# Altium PCB Single Channel Isolated Gate Driver Test Board.PcbDoc
Units mm, origin at the board's own origin, x right, y up, seen from the top; angles counter-clockwise.
Board outline 61.47 x 44.45 mm, 2 copper layers (Top Layer, Bottom Layer); 42 components, 19 nets, 91 pads, 4 vias.
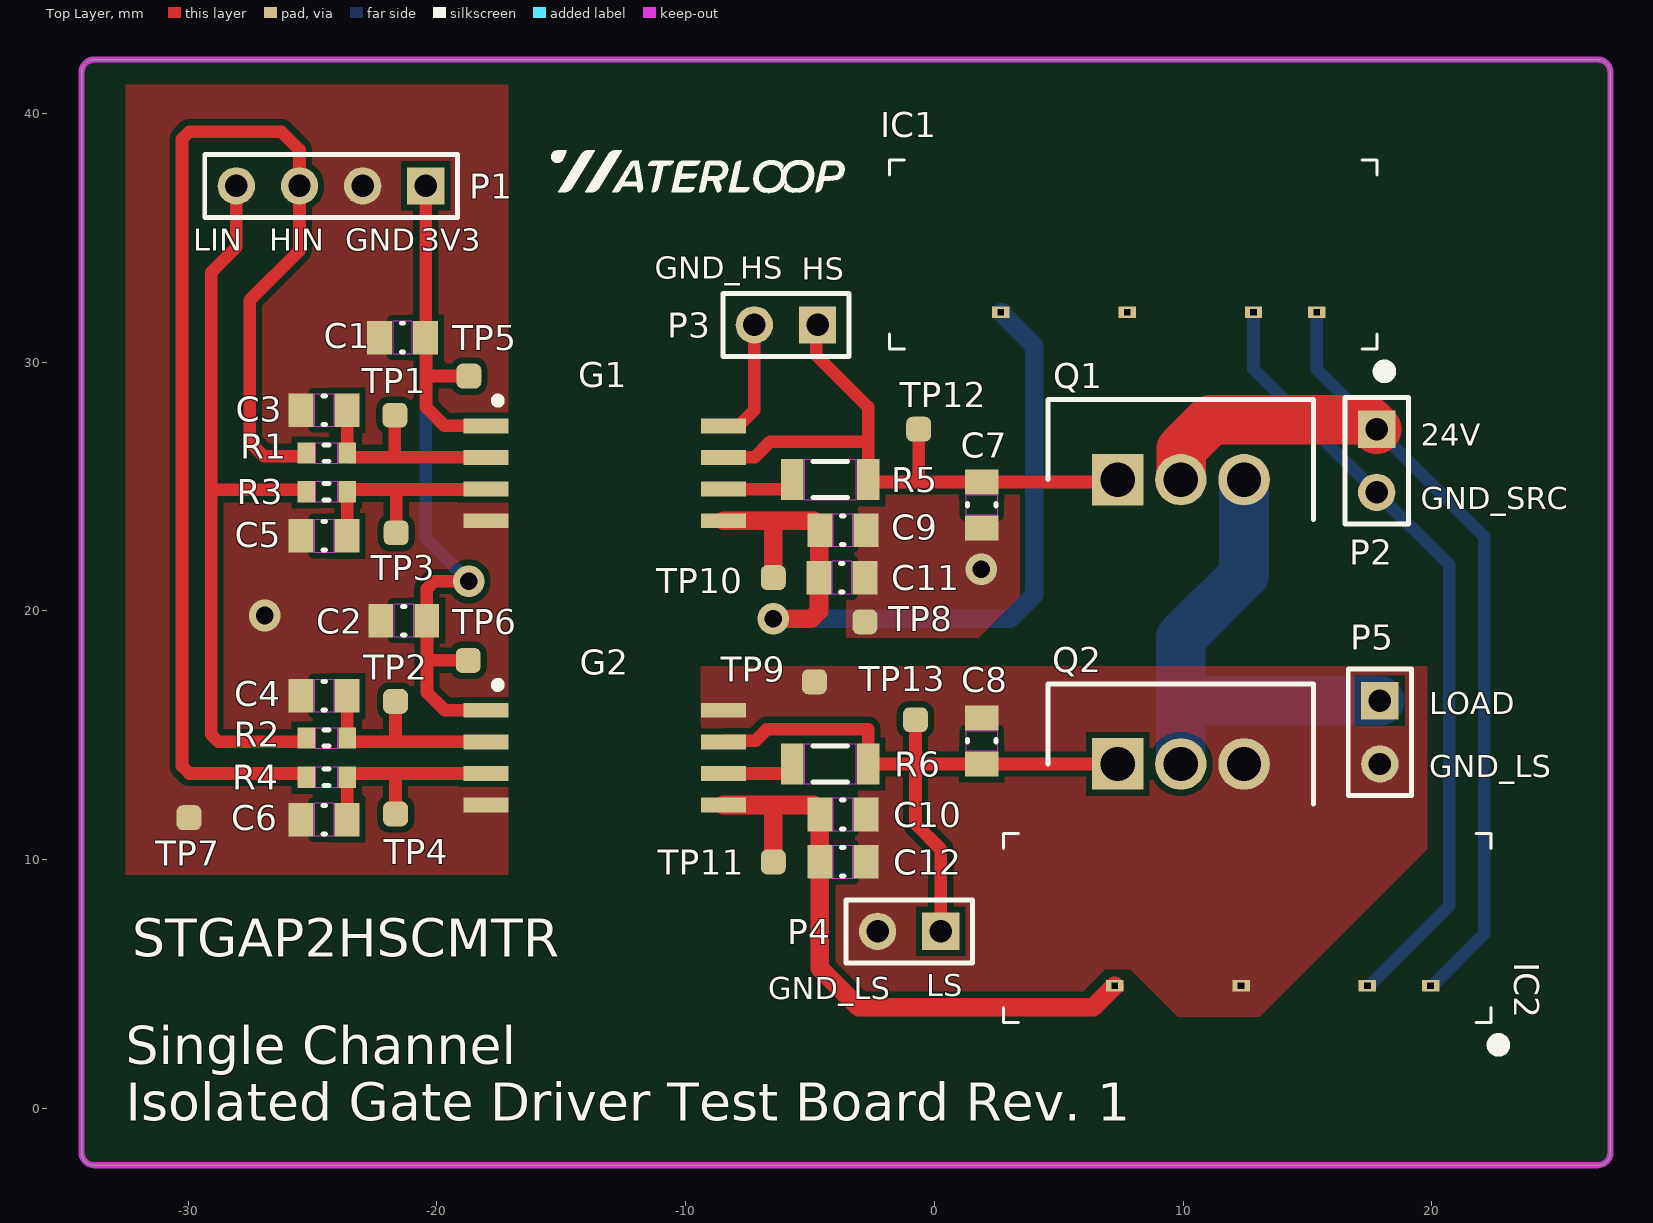
[diagram p0: Top Layer view]
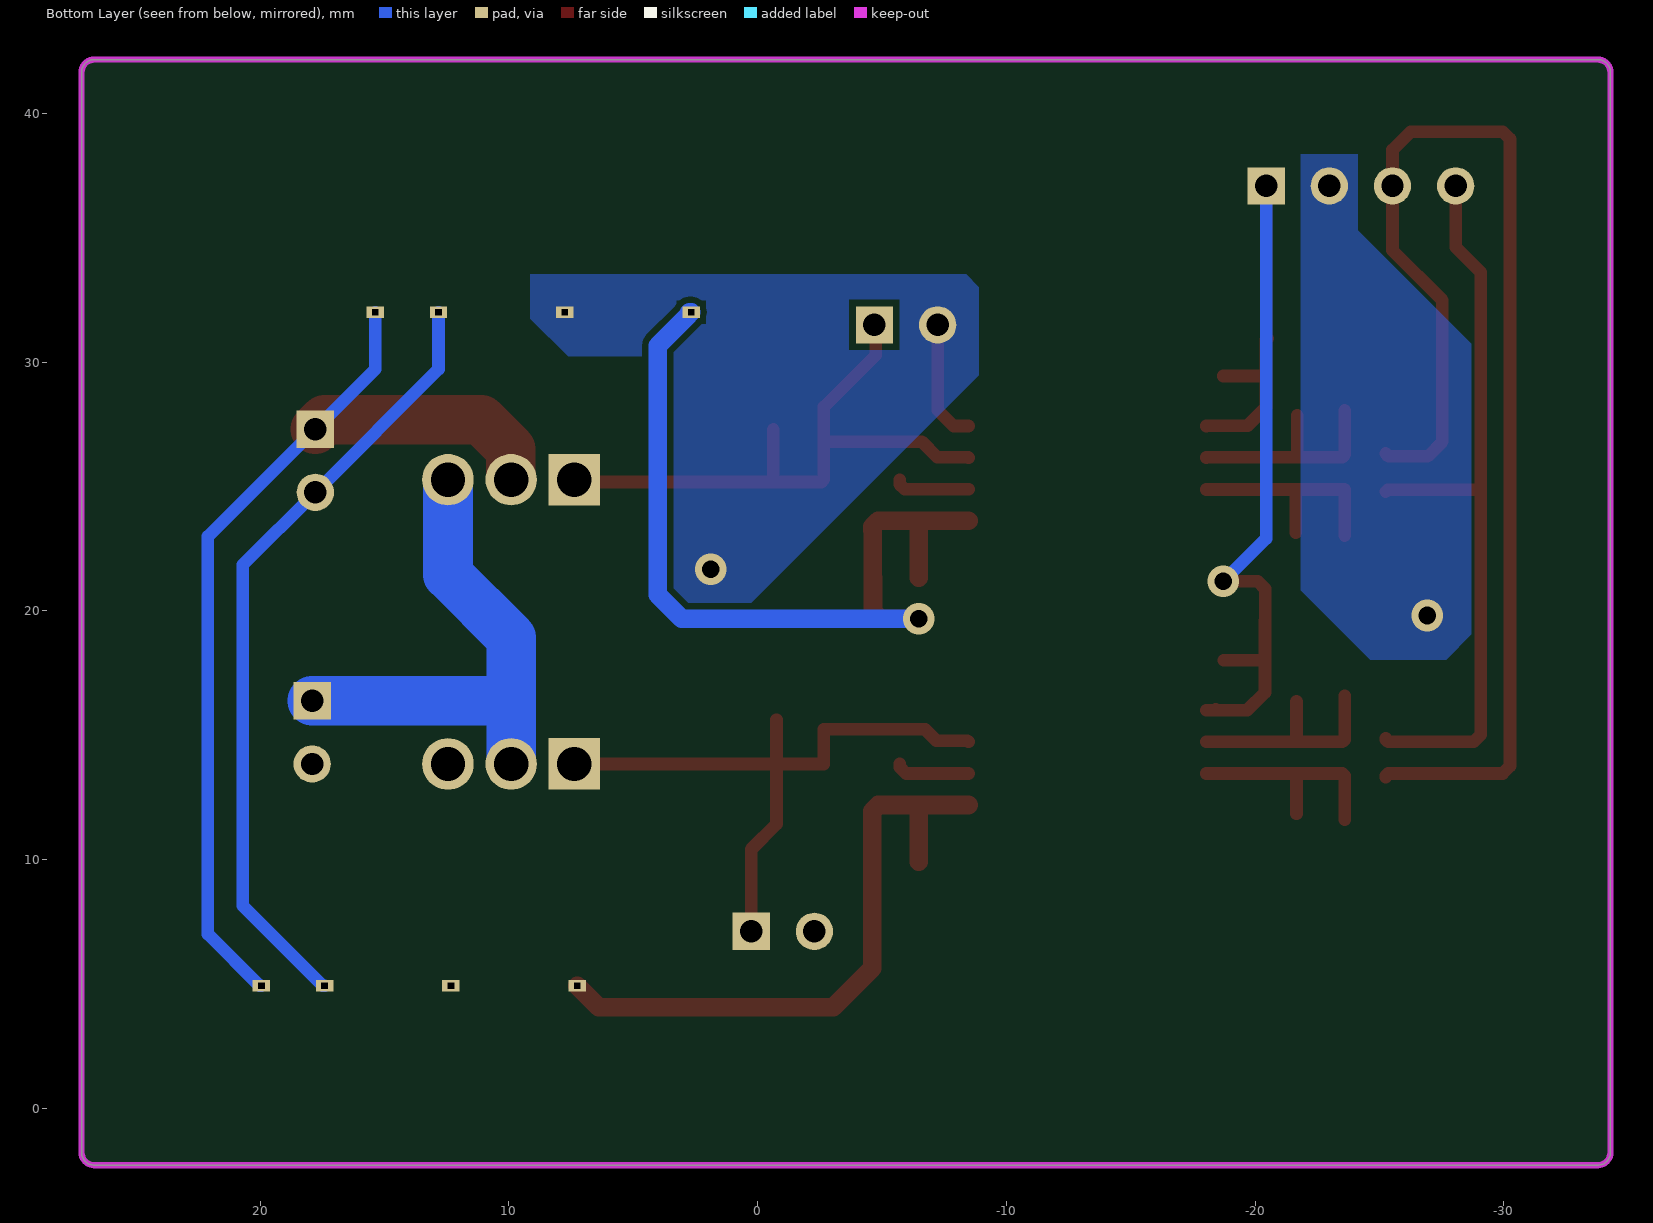
[diagram p1: Bottom Layer view, seen from below]
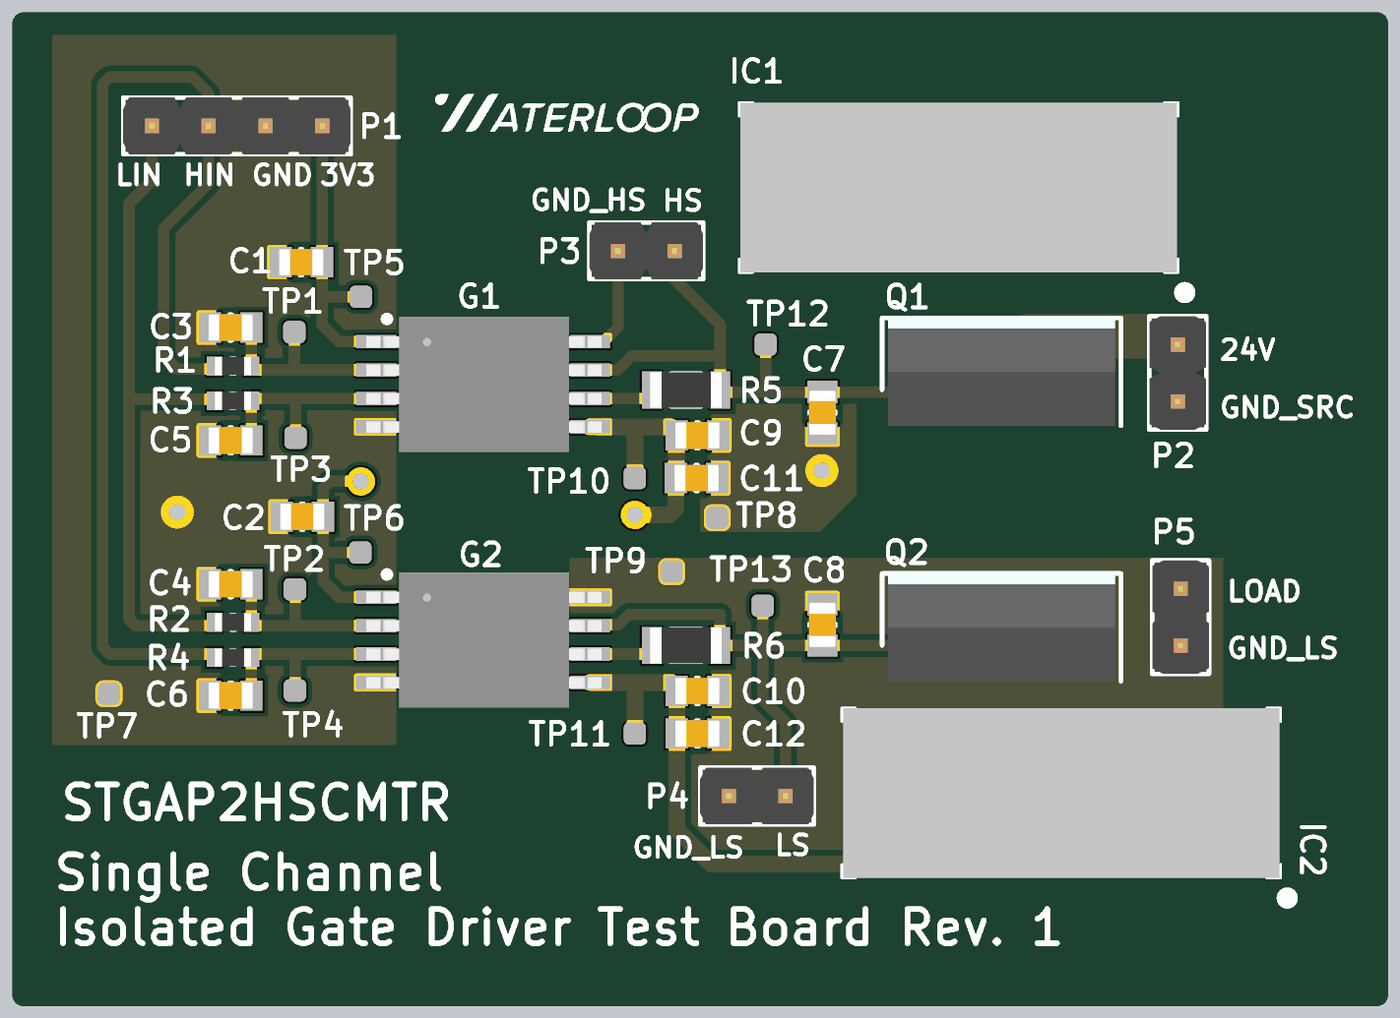
[diagram p2: 3D render of the assembled board from above, using the file's embedded part models]

## Layer stack, top to bottom
Top Solder: solder mask 0.0102, Solder Resist, Dk 3.5
Top Layer: signal copper 0.0356
Dielectric 1: dielectric 0.32, FR-4, Dk 4.8
Bottom Layer: signal copper 0.0356
Bottom Solder: solder mask 0.0102, Solder Resist, Dk 3.5

## Board outline
-34.29,-1.778 -34.29,41.656 cw(c-33.782,41.656) -33.782,42.164 26.67,42.164 cw(c26.67,41.656) 27.178,41.656 27.178,-1.778 cw(c26.67,-1.778) 26.67,-2.286 -33.782,-2.286 cw(c-33.782,-1.778)

## Design rules (kind name [scope] priority, off if disabled: settings)
Clearance [All] p1: gap=0.254 ignorepadtopadclearanceinfootprint=FALSE except(0: Arc-Hole Track-Hole SMDPad-Hole THPad-Hole Via-Hole Fill-Hole Poly-Hole Region-Hole Text-Hole)
PlaneConnect [All] p1: planeconnectstyle=Direct reliefexpansion=0.508 reliefentries=4 reliefconductorwidth=0.254 reliefairgap=0.254
PolygonConnect [All] p1: connectstyle=Direct reliefconductorwidth=0.254 reliefentries=4 polygonreliefangle="90 Angle" airgapwidth=0.254
RoutingVias [All] p1: holewidth=0.711 width=1.27 viastyle="Through Hole" minholewidth=0.35 minwidth=0.65 maxholewidth=3 maxwidth=6
SolderMaskExpansion [All] p1: expansion=0.102 istentingtop=FALSE
Width [All] p1: maxlimit=2.54 minlimit=0.254 preferedwidth=0.508 minimp=50.000000 maximp=50.000000 favimp=50.000000
29 further rules are at their usual default settings.

## Components (designator, comment, footprint, x,y, rotation, side; value= is the part's Value field where it differs from the comment)
C1 "Capacitor - Nonpolarized" "0805 - Capacitor" -21.387,30.988 r180 top value="100 nF"
C2 "Capacitor - Nonpolarized" "0805 - Capacitor" -21.336,19.609 r180 top value="100 nF"
C3 "Capacitor - Nonpolarized" "0805 - Capacitor" -24.536,28.067 r0 top value="15 pF"
C4 "Capacitor - Nonpolarized" "0805 - Capacitor" -24.536,16.586 r0 top value="15 pF"
C5 "Capacitor - Nonpolarized" "0805 - Capacitor" -24.536,23.012 r0 top value="15 pF"
C6 "Capacitor - Nonpolarized" "0805 - Capacitor" -24.536,11.608 r0 top value="15 pF"
C7 "Capacitor - Nonpolarized" "0805 - Capacitor" 1.905,24.257 r90 top value="1 nF"
C8 "Capacitor - Nonpolarized" "0805 - Capacitor" 1.905,14.768 r270 top value="1 nF"
C9 "Capacitor - Nonpolarized" "0805 - Capacitor" -3.683,23.241 r180 top value="100 nF"
C10 "Capacitor - Nonpolarized" "0805 - Capacitor" -3.683,9.906 r180 top value="100 nF"
C11 "Capacitor - Nonpolarized" "0805 - Capacitor" -3.719,21.336 r180 top value="1 uF"
C12 "Capacitor - Nonpolarized" "0805 - Capacitor" -3.683,11.811 r180 top value="1 uF"
G1 "STGAP2HSCMTR" STGAP2HSCMTR -17.056,22.452 r0 top
G2 "STGAP2HSCMTR" STGAP2HSCMTR -17.056,11.022 r0 top
IC1 "TBA 2-2413" "TBA 2-2413" 7.992,38.129 r180 top
IC2 "TBA 2-2413" "TBA 2-2413" 12.573,11.049 r180 top
P1 "1x4 Header" HDR1X4 -20.447,37.084 r180 top
P2 "1x2 Header" HDR1X2 17.78,27.305 r270 top
P3 "1x2 Header" HDR1X2 -4.699,31.496 r180 top
P4 "1x2 Header" HDR1X2 0.254,7.112 r180 top
P5 "1x2 Header" HDR1X2 17.907,16.383 r270 top
Q1 "MOSFET-P" TO2520AB 7.366,25.273 r0 top
Q2 "MOSFET-P" TO2520AB 7.366,13.843 r0 top
R1 "Resistor" "0603 - Resistor" -24.435,26.34 r0 top value=10K
R2 "Resistor" "0603 - Resistor" -24.435,14.884 r0 top value=10K
R3 "Resistor" "0603 - Resistor" -24.435,24.79 r0 top value=10K
R4 "Resistor" "0603 - Resistor" -24.435,13.31 r0 top value=10K
R5 "Resistor" "1206 - Resistor" -4.191,25.273 r0 top value=10
R6 "Resistor" "1206 - Resistor" -4.191,13.843 r0 top value=10
TP1 "Test Point" "Test Point" -21.692,27.864 r90 top
TP2 "Test Point" "Test Point" -21.666,16.358 r90 top
TP3 "Test Point" "Test Point" -21.641,23.139 r90 top
TP4 "Test Point" "Test Point" -21.666,11.836 r90 top
TP5 "Test Point" "Test Point" -18.72,29.439 r90 top
TP6 "Test Point" "Test Point" -18.745,18.009 r90 top
TP7 "Test Point" "Test Point" -29.972,11.684 r90 top
TP8 "Test Point" "Test Point" -2.794,19.558 r90 top locked
TP9 "Test Point" "Test Point" -4.826,17.145 r90 top
TP10 "Test Point" "Test Point" -6.477,21.336 r90 top
TP11 "Test Point" "Test Point" -6.477,9.906 r90 top
TP12 "Test Point" "Test Point" -0.635,27.305 r90 top
TP13 "Test Point" "Test Point" -0.762,15.621 r90 top

## Footprints (in the part's own frame and the unit in brackets; to place one, negate y for a bottom-side part, rotate by r counter-clockwise, add the part's x,y. Pads: shape width x height; smd on the part's side, far side on the other; paste and mask are expansions set on the pad)
"0603 - Resistor" [mm] "0603 Chip Resistor - IPC Medium Density"
  rect 0.7x0.85 smd: 1(-0.825,0) 2(0.825,0)
  Top Layer keep-out region: -0.45,0.4 -0.45,-0.4 0.45,-0.4 0.45,0.4
  silkscreen extent -0.1,-0.33 0.1,0.33, body extent -0.8,-0.4 0.8,0.4, height 0.45
"0805 - Capacitor" [mm] "0805 Chip Capacitor - IPC Medium Density"
  rect 1x1.35 smd: 1(-0.925,0) 2(0.925,0)
  Top Layer keep-out region: -0.4,0.65 -0.4,-0.65 0.4,-0.65 0.4,0.65
  silkscreen extent -0.05,-0.58 0.05,0.58, body extent -1,-0.6 1,0.6, height 1.2
"1206 - Resistor" [mm] "1206 Chip Resistor - IPC Medium Density"
  rect 0.9x1.65 smd: 1(-1.525,0) 2(1.525,0)
  Top Layer keep-out region: -1.05,0.8 -1.05,-0.8 1.05,-0.8 1.05,0.8
  silkscreen extent -0.7,-0.72 0.7,0.72, body extent -1.6,-0.8 1.6,0.8, height 0.55
HDR1X2 [mm] "Connector; Header; 2 Position"
  rect 1.5x1.5 hole 0.9: 1(0,0)
  round 1.5 hole 0.9: 2(2.54,0)
  silkscreen extent -1.27,-1.27 3.81,1.27, body extent -1.27,-1.27 3.81,1.27, height 8.54
HDR1X4 [mm] "Connector; Header; 4 Position"
  rect 1.5x1.5 hole 0.9: 1(0,0)
  round 1.5 hole 0.9: 2(2.54,0) 3(5.08,0) 4(7.62,0)
  silkscreen extent -1.27,-1.27 8.89,1.27, body extent -1.27,-1.27 8.89,1.27, height 8.54
STGAP2HSCMTR [mm] "Galvanically Isolated 4A Single Gate Driver"
  rect 1.8x0.6 smd: 1(-0.978,4.98) 2(-0.978,3.71) 3(-0.978,2.44) 4(-0.978,1.17) 5(8.572,1.17) 6(8.572,2.44) 7(8.572,3.71) 8(8.572,4.98)
  silkscreen extent -0.58,5.92 -0.42,6.08, body extent -1.42,0.04 9.1,6.09, height 2.64
"TBA 2-2413" [mm] "DC DC CONVERTER 15V 2W"
  rect 0.7x0.45 hole 0.25 square: 1(-7.375,6.125) 2(-4.835,6.125) 4(0.246,6.125) 6(5.325,6.125)
  silkscreen extent -10.32,0 9.8,8.72, body extent -9.75,0 9.75,7.6, height 10.24
"Test Point" [mm] "Test Point"
  rrect50% 1x1 smd: 1(0,0)
TO2520AB [mm]
  rect 2.07x2.07 hole 1.38: 1(0,0)
  round 2.07 hole 1.38: 2(2.54,0) 3(5.08,0)
  silkscreen extent -2.8,-1.61 7.88,3.22, body extent -2.54,-1.61 7.62,3.22, height 18.86

## Part data
C1 C2 C3 C4 C5 C6 C7 C8 C9 C10 C11 C12: "Nonpolarized Capacitor"
IC1 IC2: "DC DC CONVERTER 15V 2W"
P1: "1x4 Pin Header"
P2 P3 P4 P5: "1x2 Pin Header"
Q1 Q2: "P-Channel MOSFET"

## Via types
v1: diameter 1.27, hole 0.711, Top Layer to Bottom Layer, 4 vias

## Nets (pads, with @x,y where several pads share a name; then routed paths per layer and width w, separated by ;. In a path a pad name is that pad's centre, name@x,y a point inside that pad or via, vN(x,y) a via of type N, cw(c..) or ccw(c..) an arc to the next point about the centre after c; other vN are vias at no path point)
3V3: C1.1 C2.1 G1.1 G2.1 P1.1 TP5.1 TP6.1 | length 40.3
  Top Layer w0.508: C1.1@-20.5,30.95 -20.443,30.893 -20.443,29.444 ; C1.1@-20.447,31.003 P1.1 ; TP6.1 -20.377,18.009 -20.402,17.983 ; TP5.1@-18.725,29.444 -20.443,29.444 ; v1(-18.72,21.184) -20.113,21.184 -20.411,20.886 C2.1 -20.402,19.6 -20.402,17.983 ; G2.1@-18.415,16.048 G2.1@-18.369,16.002 ; G2.1 G2.1@-18.369,16.002 ; G1.1 -18.045,27.443 -19.696,27.443 -20.443,28.19 -20.443,29.444 ; -20.402,17.983 -20.402,16.719 -19.685,16.002 G2.1@-18.369,16.002
  Bottom Layer w0.508: P1.1 -20.447,22.911 v1(-18.72,21.184)
24V: IC1.1 IC2.1 P2.1 Q1.2 | length 40.5
  Top Layer w2: Q1.2@9.906,25.292 9.919,25.305 9.919,26.493 11.113,27.686 17.399,27.686 P2.1
  Bottom Layer w0.508: IC1.1 15.367,29.718 P2.1 22.098,22.987 22.098,7.007 20.015,4.924 IC2.1
GND: C1.2 C2.2 C3.1 C4.1 C5.1 C6.1 G1.4 G2.4 P1.2 TP7.1
  other v1: -26.924,19.812
GND_HS: C7.1 C9.1 C11.1 G1.8 IC1.4 P3.2 TP8.1 | length 4.9
  Top Layer w0.508: G1.8 -7.883,27.432 -7.239,28.076 P3.2
  other v1: 1.88,21.666
GND_LS: C8.1 C10.1 C12.1 G2.8 IC2.4 P4.2 P5.2 Q2.3 TP9.1 | length 0.1
  Top Layer w0.508: P4.2@-2.349,7.175 P4.2
GND_SRC: IC1.2 IC2.2 P2.2 | length 31.7
  Bottom Layer w0.508: IC1.2 12.827,29.718 P2.2 20.701,21.844 20.701,8.15 17.475,4.924 IC2.2
NetC3_2: C3.2 G1.2 R1.2 TP1.1 | length 9.1
  Top Layer w0.508: R1.2@-23.611,26.341 C3.2 ; R1.2 -23.61,26.271 -23.514,26.175 -21.692,26.175 ; TP1.1 -21.692,26.175 ; G1.2 -18.047,26.175 -21.692,26.175
NetC4_2: C4.2 G2.2 R2.2 TP2.1 | length 9
  Top Layer w0.508: R2.2@-23.611,14.885 C4.2 ; R2.2 -23.61,14.828 -23.514,14.732 -21.692,14.732 ; TP2.1 -21.666,14.757 -21.692,14.732 ; G2.2 -21.692,14.732
NetC5_2: C5.2 G1.3 R3.2 TP3.1 | length 9.2
  Top Layer w0.508: C5.2 R3.2@-23.611,24.79 ; R3.2 -23.61,24.816 -23.61,24.867 -23.597,24.879 -21.641,24.879 ; TP3.1 -21.641,24.879 ; G1.3 -18.047,24.879 -21.641,24.879
NetC6_2: C6.2 G2.3 R4.2 TP4.1 | length 9
  Top Layer w0.508: C6.2 R4.2@-23.611,13.309 ; R4.2 -23.61,13.366 -23.514,13.462 -21.717,13.462 ; TP4.1 -21.666,13.411 -21.717,13.462 ; G2.3 -21.717,13.462
NetC7_2: C7.2 G1.7 P3.1 Q1.1 R5.2 TP12.1 | length 25.4
  Top Layer w0.508: G1.7 -8.475,26.171 -7.23,26.171 -6.604,26.797 -2.666,26.797 ; P3.1 -4.755,31.44 -4.755,30.282 -2.666,28.193 -2.666,26.797 ; TP12.1 -0.635,25.182 ; Q1.1 7.275,25.182 C7.2 -0.635,25.182 ; -2.666,26.797 R5.2 -2.575,25.182 -0.635,25.182
NetC8_2: C8.2 G2.7 P4.1 Q2.1 R6.2 TP13.1 | length 26.4
  Top Layer w0.508: G2.7 -8.438,14.778 -7.193,14.778 -6.731,15.24 -2.667,15.24 R6.2 R6.2 -0.762,13.843 ; TP13.1 -0.762,13.843 ; P4.1 0.254,10.414 -0.762,11.43 -0.762,13.843 ; Q2.1 C8.2 -0.762,13.843
NetC9_2: C9.2 C11.2 G1.5 IC1.6 TP10.1 | length 34.6
  Top Layer w0.75: G1.5 -6.477,23.622 ; v1(-6.477,19.685) -4.942,19.685 -4.644,19.983 C11.2 ; TP10.1 -6.477,23.622 ; C11.2@-4.626,21.179 -4.626,23.223 C9.2 -4.608,23.376 -4.854,23.622 -6.477,23.622
  Bottom Layer w0.75: v1(-6.477,19.685) 3.048,19.685 4.013,20.65 4.013,30.658 2.763,31.908 2.763,31.975 2.734,32.004 IC1.6
NetC10_2: C10.2 C12.2 G2.5 IC2.6 TP11.1 | length 25.4
  Top Layer w0.75: G2.5 -6.477,12.192 ; TP11.1 -6.477,12.192 ; IC2.6 6.388,4.064 -3.048,4.064 -4.608,5.624 C10.2 C12.2 -4.608,11.946 -4.854,12.192 -6.477,12.192
NetG1_6: G1.6 R5.1 | length 3
  Top Layer w0.508: G1.6 -5.912,24.892 -5.716,25.088 R5.1
NetG2_6: G2.6 R6.1 | length 3
  Top Layer w0.508: G2.6 -5.976,13.462 -5.716,13.722 R6.1
NetP1_3: P1.3 R1.1 R4.1 | length 50.7
  Top Layer w0.508: R4.1 -25.26,13.366 -25.356,13.462 -29.954,13.462 -30.251,13.76 -30.251,38.971 -29.954,39.268 -26.264,39.268 -25.527,38.532 P1.3 -25.527,34.493 -27.534,32.487 -27.534,26.797 -26.949,26.213 -25.356,26.213 -25.26,26.309 R1.1
NetP1_4: P1.4 R2.1 R3.1 | length 30.4
  Top Layer w0.508: P1.4 -28.067,34.62 -29.083,33.604 -29.083,24.867 ; R2.1 -25.26,14.828 -25.356,14.732 -28.785,14.732 -29.083,15.03 -29.083,24.867 ; R3.1 -25.336,24.867 -29.083,24.867
NetP5_1: P5.1 Q1.3 Q2.2 | length 20.5
  Bottom Layer w2: Q2.2 9.906,16.383 ; Q1.3 12.446,21.463 9.906,18.923 9.906,16.383 ; P5.1 9.906,16.383

## Polygon pours and split planes (outlines as drawn)
GND_HS on Bottom Layer "GND_HS_L02_P012" (solid, pour order 12): -8.89,33.02 -8.382,33.528 9.144,33.528 9.144,31.75 7.62,30.226 3.81,30.226 3.81,20.32 0.254,20.32 -8.89,29.464
GND on Bottom Layer "GND_L02_P005" (solid, pour order 5): -28.702,19.05 -27.686,18.034 -24.638,18.034 -21.844,20.828 -21.844,38.354 -24.13,38.354 -24.13,35.306 -28.702,30.734
GND_LS on Top Layer "GND_LS_L01_P007" (solid, remove dead copper, pour order 7): 9.779,3.683 7.874,5.588 6.858,5.588 5.57,4.3 -4.445,4.064 -4.445,10.414 -9.398,15.367 -9.398,17.78 19.812,17.78 19.812,10.414 13.081,3.683
GND on Top Layer "GND_L01_P000" (solid, remove dead copper, pour order 0): -32.512,41.148 -17.145,41.148 -17.145,9.398 -32.512,9.398
GND_HS on Top Layer "GND_HS_L01_P008" (solid, remove dead copper, pour order 8): 1.778,18.923 3.429,20.574 3.429,25.4 -3.429,25.4 -3.556,25.273 -3.556,18.923

## Keep-outs
Keep-Out Layer:
  the board outline again, w0.254

## Silkscreen, mask and mechanical layers (free items; w line width, h text height)
Top Overlay:
  drawing of 10 lines, arcs and shapes, not listed
  text "LIN" at -29.794,34.468 h0.89
  text "HIN" at -26.746,34.468 h0.89
  text "GND" at -23.698,34.468 h0.89
  text "3V3" at -20.65,34.468 h0.89
  text "GND_HS" at -11.252,33.346 h0.89
  text "HS" at -5.337,33.32 h0.89
  text "24V" at 19.558,26.645 h0.89
  text "GND_SRC" at 19.558,24.075 h0.89
  text "LOAD" at 19.888,15.85 h0.89
  text "GND_LS" at 19.888,13.305 h0.89
  text "STGAP2HSCMTR" at -32.258,6.096 h1.52
  text "LS" at -0.33,4.496 h0.89
  text "GND_LS" at -6.68,4.39 h0.89
  text "Single Channel / Isolated Gate Driver Test Board Rev. 1" at -32.512,-0.508 h1.52